# EAGLE board M_3x4._v2brd (EAGLE 9.6.2), part 1 of 2
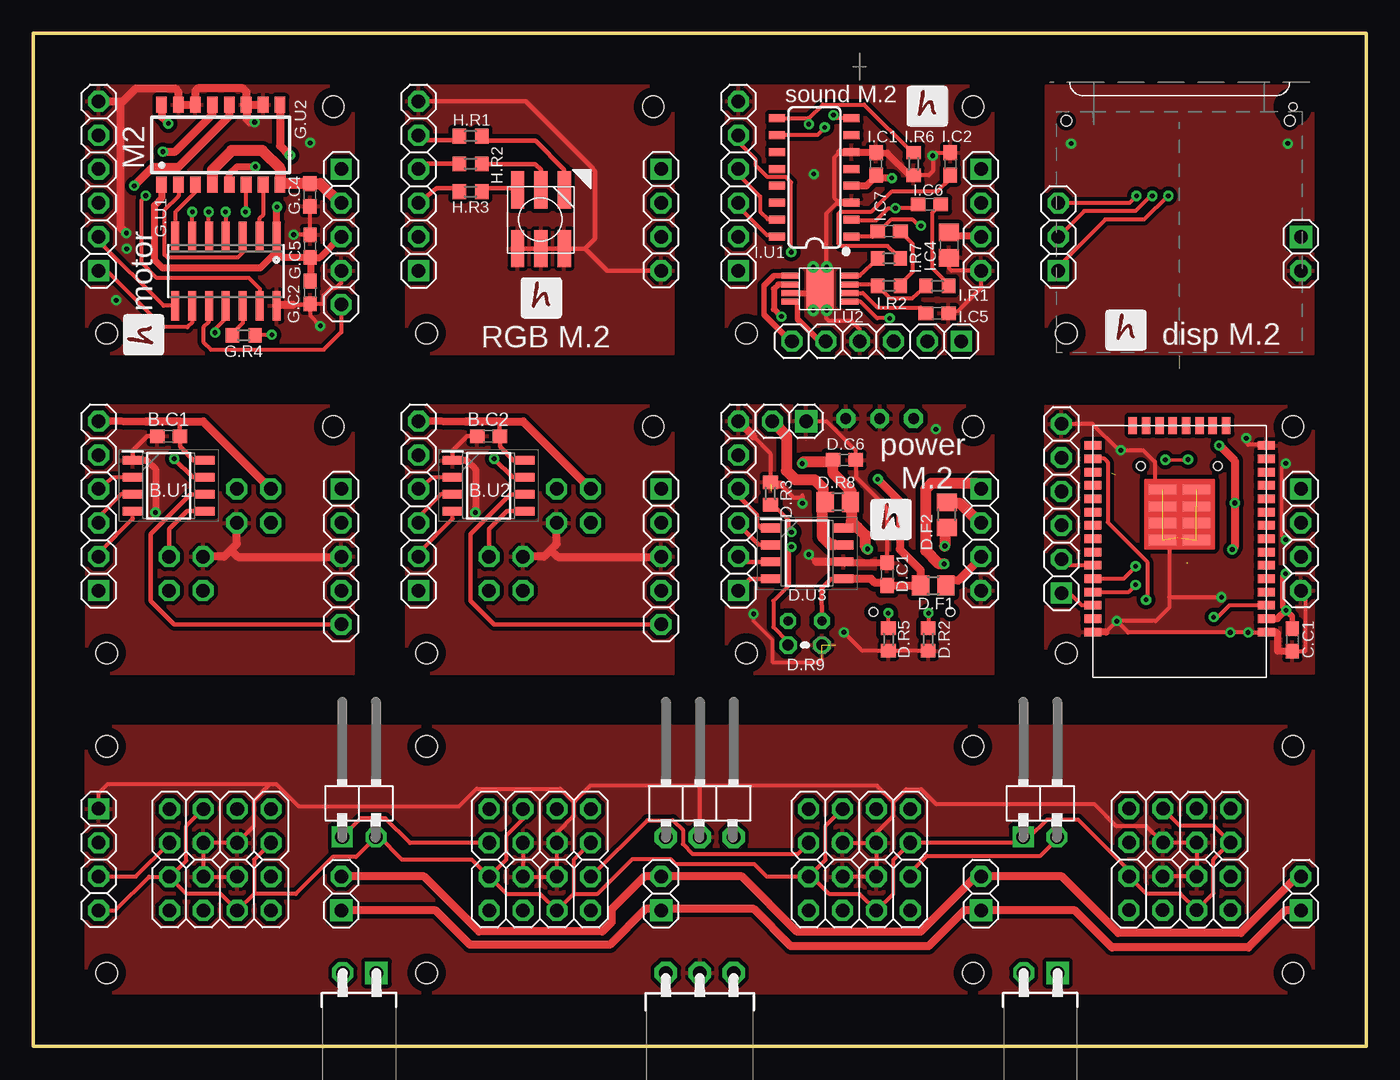
[diagram p0: board, top side]
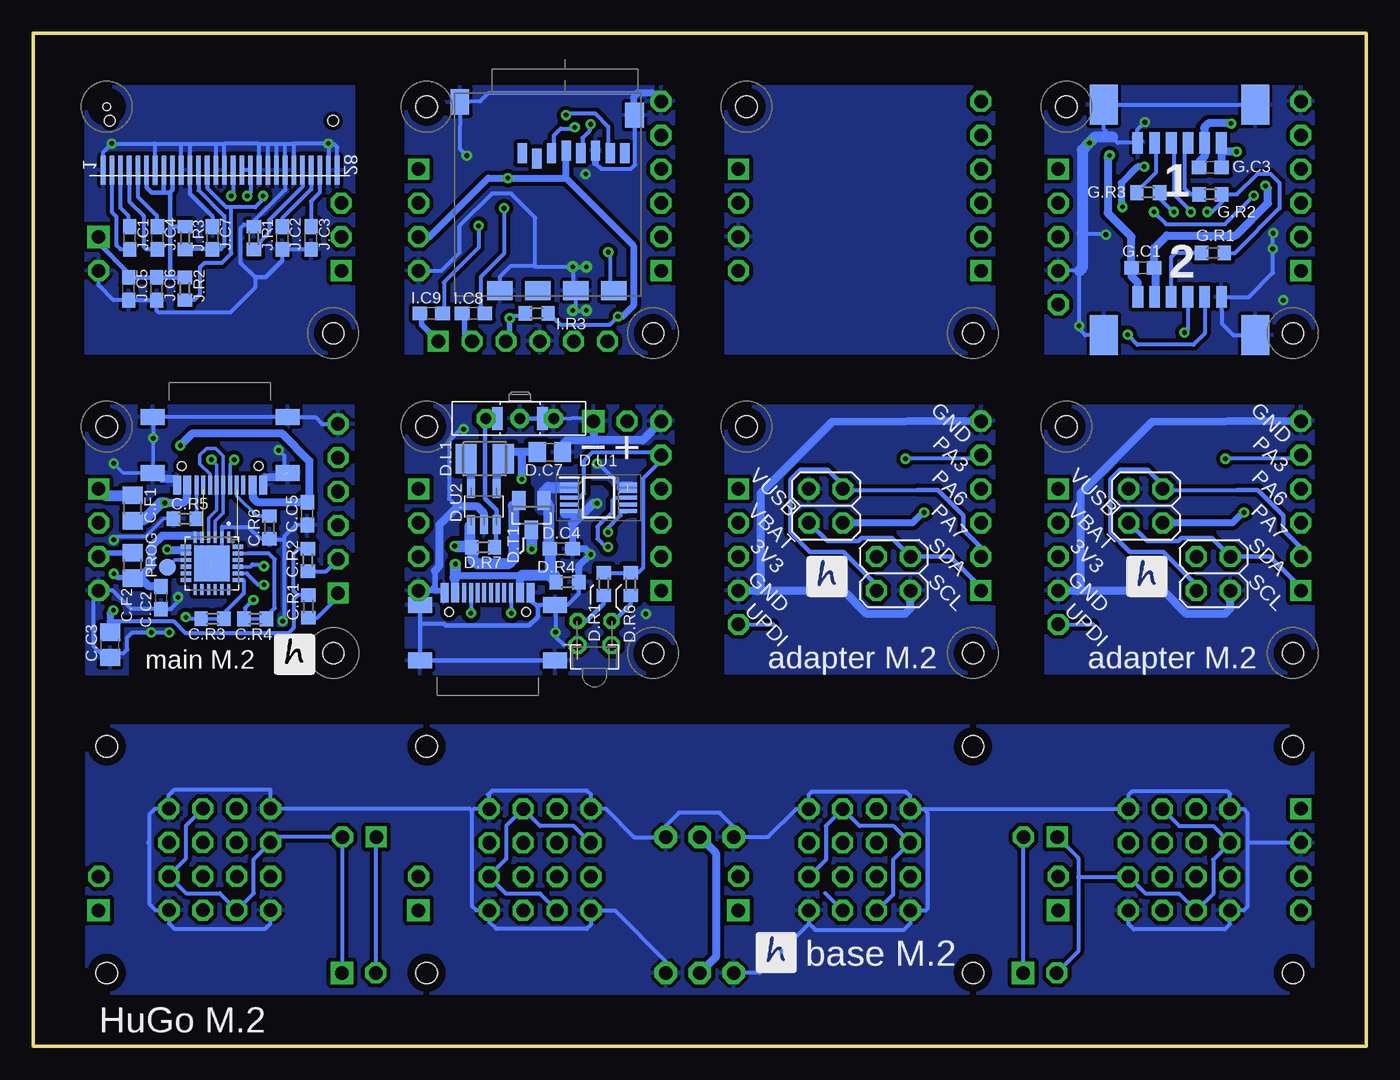
[diagram p1: board, bottom side, seen from below]

Size 100 x 76 mm. Coordinates in mm from the lower left corner, seen from the top.
Outline: 0,0 100,0 100,76 0,76 0,0
Copper layers (1*16): Top 0.035mm / dielectric 1.5mm / Bottom 0.035mm
Design rules "default *": minimum track width 10mil, minimum drill 0.35mm, track to track 6mil, track to pad 6mil, pad to pad 6mil, via to via 6mil, smd to smd 6mil, copper to edge 0mil, drill to drill 15mil, minimum pad ring 10mil, minimum via ring 8mil, stop-mask expansion 4mil, vias tented up to drill 0mil, thermal gap 10mil
Holes 1.6 mm at 94.5,5.5 94.5,22.5 5.5,22.5 5.5,5.5 70.5,22.5 70.5,5.5 29.5,22.5 29.5,5.5 29.5,29.5 46.5,46.5 29.5,53.5 46.5,70.5 53.5,53.5 70.5,70.5 5.5,29.5 22.5,46.5 5.5,53.5 22.5,70.5 53.5,29.5 70.5,46.5 77.5,53.5 77.5,29.5 94.5,46.5
Holes 0.6 mm at 94.5,70.5
tRestrict: area 4.5,21.5 to 6.5,23.5; area 4.5,4.5 to 6.5,6.5; area 93.5,21.5 to 95.5,23.5; area 93.5,4.5 to 95.5,6.5; area 69.5,21.5 to 71.5,23.5; area 69.5,4.5 to 71.5,6.5; area 28.5,4.5 to 30.5,6.5; area 28.5,21.5 to 30.5,23.5; area 45.5,69.5 to 47.5,71.5; area 28.5,52.5 to 30.5,54.5; area 69.5,69.5 to 71.5,71.5; area 52.5,52.5 to 54.5,54.5; 12 more areas
bRestrict: area 4.5,4.5 to 6.5,6.5; area 4.5,21.5 to 6.5,23.5; area 93.5,4.5 to 95.5,6.5; area 93.5,21.5 to 95.5,23.5; area 69.5,21.5 to 71.5,23.5; area 69.5,4.5 to 71.5,6.5; area 28.5,4.5 to 30.5,6.5; area 28.5,21.5 to 30.5,23.5; area 28.5,52.5 to 30.5,54.5; area 45.5,69.5 to 47.5,71.5; area 52.5,52.5 to 54.5,54.5; area 69.5,69.5 to 71.5,71.5; 12 more areas

## Footprints (pad centres in the part's own frame; a part is rotated, then mirrored left to right if it is on the bottom)
2X04 = drill 1.016 pad 1.575 octagon: 1 -3.81,-1.27; 2 -3.81,1.27; 3 -1.27,-1.27; 4 -1.27,1.27; 5 1.27,-1.27; 6 1.27,1.27; 7 3.81,-1.27; 8 3.81,1.27
1X02/90 = drill 1.016 pad 1.575 square: 1 -1.27,-3.81 | drill 1.016 pad 1.575 octagon: 2 1.27,-3.81
1X03/90 = drill 1.016 pad 1.676 octagon: 1 -2.54,-3.81; 2 0,-3.81; 3 2.54,-3.81
1X03/90F = drill 1.016 pad 1.676 octagon: 1 -2.54,0; 2 0,0; 3 2.54,0
1X02/90F = drill 1.016 pad 1.676 square: 1 -1.31,0 | drill 1.016 pad 1.575 octagon: 2 1.23,0
1X04 = drill 1.016 pad 1.575 square: 1 -3.81,0 | drill 1.016 pad 1.575 octagon: 2 -1.27,0; 3 1.27,0; 4 3.81,0
C0603 = smd 1.1 x 1: 1 -0.85,0; 2 0.85,0
1X06 = drill 1.016 pad 1.575 square: 1 -6.35,0 | drill 1.016 pad 1.575 octagon: 2 -3.81,0; 3 -1.27,0; 4 1.27,0; 5 3.81,0; 6 6.35,0
2X02 = drill 1.016 pad 1.575 octagon: 1 -1.27,-1.27; 2 -1.27,1.27; 3 1.27,-1.27; 4 1.27,1.27
1X05 = drill 1.016 pad 1.575 square: 1 -5.08,0 | drill 1.016 pad 1.575 octagon: 2 -2.54,0; 3 0,0; 4 2.54,0; 5 5.08,0
SOIC127P600X175-8N = smd 1.5 x 0.65: 1 -2.7,1.905; 2 -2.7,0.635; 3 -2.7,-0.635; 4 -2.7,-1.905; 5 2.7,-1.905; 6 2.7,-0.635; 7 2.7,0.635; 8 2.7,1.905
C0805 = smd 1.3 x 1.5: 1 -0.95,0; 2 0.95,0
R0805 = smd 1.3 x 1.5: 1 -0.95,0; 2 0.95,0
R0603 = smd 1 x 1.1: 1 -0.85,0; 2 0.85,0
TTGO-MICRO-32 = smd 1.27 x 0.635: 3V3 -6.5,5; EN -6.5,4; GND1 -6.5,6; GND2 -6.5,-8; GND3 6.5,6; IO0 6.5,-7; IO2 6.5,-8; IO4 6.5,-6; IO5 6.5,-3; IO12 -6.5,-7; IO14 -6.5,-6; IO16 6.5,-5; IO17 6.5,-4; IO18 6.5,-2; IO19 6.5,-1; IO21 6.5,1; IO22 6.5,4; IO23 6.5,5; IO25 -6.5,-3; IO26 -6.5,-4; IO27 -6.5,-5; IO32 -6.5,-1; IO33 -6.5,-2; IO34 -6.5,1; IO35 -6.5,0; NC 6.5,0; RXD0 6.5,2; TXD0 6.5,3; VN -6.5,2; VP -6.5,3 | smd 0.635 x 1.27: CLK 0.5,-9.5; CMD -0.5,-9.5; IO13 -3.5,-9.5; IO15 3.5,-9.5; SD0 1.5,-9.5; SD1 2.5,-9.5; SD2 -2.5,-9.5; SD3 -1.5,-9.5 | smd 2.032 x 0.762: GND4 -1.27,-0.889; GND5 1.27,-0.889; GND6 -1.27,-2.159; GND7 1.27,-2.159; GND8 -1.27,-3.429; GND9 -1.27,-4.699; GND10 1.27,-3.429; GND11 1.27,-4.699
LED_1.8 = drill 0.7 octagon: 1 -1.27,-0.4; 2 1.27,-0.4
L3230M = smd 1.6 x 2.2: 1 -1.4,0; 2 1.4,0
1X02 = drill 1.016 pad 1.676 square: 1 -1.27,0 | drill 1.016 pad 1.575 octagon: 2 1.27,0
SWITCH = drill 0.8 pad 1.422 octagon: P$1 -2.54,0; P$2 0,0; P$3 2.54,0 | smd 0.8 x 1.7: P$4 -1.7,0; P$5 1.7,0
THERM = drill 0.813 octagon: 1 -1.27,0; 2 1.27,0
SOT23 = smd 1 x 1.4: D 0,1.1; G -0.95,-1.1; S 0.95,-1.1
SOP50P490X110-10N = smd 1.4 x 0.3: 1 -2.2,1; 2 -2.2,0.5; 3 -2.2,0; 4 -2.2,-0.5; 5 -2.2,-1; 6 2.2,-1; 7 2.2,-0.5; 8 2.2,0; 9 2.2,0.5; 10 2.2,1
SOT32-5 = smd 0.6 x 1.4: BP 0.95,1.35; GND 0,-1.35; SHDN 0.95,-1.35; VIN -0.95,-1.35; VOUT -0.95,1.35
SOIC127P600X175-8N' = smd 1.528 x 0.65: 1 -2.711,1.905; 2 -2.711,0.635; 3 -2.711,-0.635; 4 -2.711,-1.905; 5 2.711,-1.905; 6 2.711,-0.635; 7 2.711,0.635; 8 2.711,1.905
A1250WR-6 = smd 0.8 x 1.6: 1 -3.128,2.54; 2 -1.878,2.54; 3 -0.628,2.54; 4 0.622,2.54; 5 1.872,2.54; 6 3.142,2.54 | smd 2.1 x 3: $1 -5.678,-0.34; $2 5.682,-0.34
SO14 = smd 0.6 x 2.2: 1 -3.81,-2.6; 2 -2.54,-2.6; 3 -1.27,-2.6; 4 0,-2.6; 5 1.27,-2.6; 6 2.54,-2.6; 7 3.81,-2.6; 8 3.81,2.6; 9 2.54,2.6; 10 1.27,2.6; 11 0,2.6; 12 -1.27,2.6; 13 -2.54,2.6; 14 -3.81,2.6
SOP16 = smd 0.8 x 1.2: 1 -4.445,-3; 2 -3.175,-3; 3 -1.905,-3; 4 -0.635,-3; 5 0.635,-3; 6 1.905,-3; 7 3.175,-3; 8 4.445,-3; 9 4.445,3; 10 3.175,3; 11 1.905,3; 12 0.635,3; 13 -0.635,3; 14 -1.905,3; 15 -3.175,3; 16 -4.445,3
RGB_WW-FCE50TC-Q1 = smd 1 x 2.8: 1 -1.778,-2.286; 2 -0.028,-2.286; 3 1.722,-2.286; 4 -1.778,2.114; 5 -0.028,2.114; 6 1.722,2.114
SSD_1306_STM32_OLED = smd 0.35 x 2.2 bottom: P$1 0,-0.4; P$2 0.65,-0.4; P$3 1.3,-0.4; P$4 1.95,-0.4; P$5 2.6,-0.4; P$6 3.25,-0.4; P$7 3.9,-0.4; P$8 4.55,-0.4; P$9 5.2,-0.4; P$10 5.85,-0.4; P$11 6.5,-0.4; P$12 7.15,-0.4; P$13 7.8,-0.4; P$14 8.45,-0.4; P$15 9.1,-0.4; P$16 9.75,-0.4; P$17 10.4,-0.4; P$18 11.05,-0.4; P$19 11.7,-0.4; P$20 12.35,-0.4; P$21 13,-0.4; P$22 13.65,-0.4; P$23 14.3,-0.4; P$24 14.95,-0.4; P$25 15.6,-0.4; P$26 16.25,-0.4; P$27 16.9,-0.4; P$28 17.55,-0.4 | hole 0.8: 0.5,-4.1; 17.25,-4.1
SO16 = smd 0.6 x 1.2: 1 -4.445,-2.8; 2 -3.175,-2.8; 3 -1.905,-2.8; 4 -0.635,-2.8; 5 0.635,-2.8; 6 1.905,-2.8; 7 3.175,-2.8; 8 4.445,-2.8; 9 4.445,2.8; 10 3.175,2.8; 11 1.905,2.8; 12 0.635,2.8; 13 -0.635,2.8; 14 -1.905,2.8; 15 -3.175,2.8; 16 -4.445,2.8
MSOP-POWERPAD-8 = smd 1.4 x 0.45: 1 -2.184,0.959; 2 -2.184,0.309; 3 -2.184,-0.341; 4 -2.184,-0.991; 5 2.216,-0.991; 6 2.216,-0.341; 7 2.216,0.309; 8 2.216,0.959 | smd 2 x 3: 9 0.016,-0.016 | drill 0.35: P$10 -0.484,-1.651; P$11 0.516,-1.651; P$12 0.516,1.619; P$13 -0.484,1.619
1X03 = drill 1.016 pad 1.575 square: 1 -2.54,0 | drill 1.016 pad 1.575 octagon: 2 0,0; 3 2.54,0
B1,27 = smd 1.27 x 1.27: TP 0,0
QFN50P400X400X80-25N = smd 0.81 x 0.26: 1 -1.955,1.25; 2 -1.955,0.75; 3 -1.955,0.25; 4 -1.955,-0.25; 5 -1.955,-0.75; 6 -1.955,-1.25; 13 1.955,-1.25; 14 1.955,-0.75; 15 1.955,-0.25; 16 1.955,0.25; 17 1.955,0.75; 18 1.955,1.25 | smd 0.26 x 0.81: 7 -1.25,-1.955; 8 -0.75,-1.955; 9 -0.25,-1.955; 10 0.25,-1.955; 11 0.75,-1.955; 12 1.25,-1.955; 19 1.25,1.955; 20 0.75,1.955; 21 0.25,1.955; 22 -0.25,1.955; 23 -0.75,1.955; 24 -1.25,1.955 | smd 2.68 x 2.68: 25 0,0
USB-C = smd 0.6 x 1.45: A1B12 -3.235,3.825; A4B9 -2.46,3.825; B1A12 3.215,3.825; B4A9 2.44,3.825 | smd 0.3 x 1.45: A5 -1.26,3.825; A6 -0.26,3.825; A7 0.24,3.825; A8 1.24,3.825; B5 1.74,3.825; B6 0.74,3.825; B7 -0.76,3.825; B8 -1.76,3.825 | smd 1.8 x 1.2: SH1 -5.08,2.91; SH2 -5.08,-1.27; SH3 5.06,-1.27; SH4 5.06,2.91 | hole 0.65: 2.88,2.38; -2.9,2.38
MOCRO_SD = smd 0.7 x 1.5: 1 8.92,-10.7; 2 7.82,-10.3; 3 6.72,-10.7; 4 5.62,-10.9; 5 4.52,-10.7; 6 3.42,-10.9; 7 2.32,-10.7; 8 1.22,-10.7 | smd 1.9 x 1.4: G1 4.9,-0.4; G2 10.6,-0.4; S1 2.05,-0.4; S2 7.75,-0.4 | smd 1.4 x 1.9: G3 0.5,-13.55; G4 13.6,-14.55

## Placement (x,y rotation side)
A.J1  [2X04]  14.02,16.53 180 top
A.J2  [2X04]  14.02,11.45 180 top
A.J3  [2X04]  38.01,16.53 180 top
A.J4  [2X04]  38.01,11.45 180 top
A.J5  [2X04]  61.98,16.53 180 top
A.J6  [2X04]  61.98,11.45 180 top
A.J7  [1X02/90]  24.44,19.5 0 top
A.J8  [1X03/90]  50,19.5 0 top
A.J9  [1X03/90F]  50,5.5 180 top
A.J10  [1X02/90F]  24.44,5.5 180 top
A.J11  [2X04]  86.01,11.47 0 top
A.J12  [2X04]  86.02,16.55 0 top
A.J13  [1X02/90F]  75.54,5.5 180 top
A.J14  [1X02/90]  75.54,19.5 0 top
A.J15  [1X04]  4.9,14 270 top
B.C1  100n  [C0603]  10.15,45.76 0 top
B.C2  100n  [C0603]  34.15,45.76 0 top
B.J1  [1X06]  28.9,40.54 90 top
B.J2  [1X06]  4.9,40.54 90 top
B.J3  [2X02]  40.54,40.54 270 bottom
B.J4  [2X02]  16.54,40.54 270 bottom
B.J5  [1X05]  23.1,36.73 270 top
B.J6  [1X05]  47.1,36.73 270 top
B.U1  AT412  [SOIC127P600X175-8N]  10.16,42.05 0 top
B.U2  AT412  [SOIC127P600X175-8N]  34.16,42.05 0 top
C.C1  100n  [C0603]  94.46,30.48 270 top
C.C2  100n  [C0603]  90.42,33.65 270 bottom
C.C3  22u  [C0805]  94.25,30.12 270 bottom
C.C5  1u  [C0603]  79.45,39.96 90 bottom
C.F1  [R0805]  92.56,40.38 90 bottom
C.F2  [R0805]  92.56,36.07 90 bottom
C.J2  [1X06]  77.14,40.35 90 top
C.R1  2k2  [R0603]  79.37,32.99 90 bottom
C.R2  2k2  [R0603]  79.4,36.48 90 bottom
C.R3  0  [R0603]  86.56,32.07 0 bottom
C.R4  0  [R0603]  83.36,32.06 180 bottom
C.R5  5K1  [R0603]  88.63,39.58 0 bottom
C.R6  5k1  [R0603]  82.28,38.93 90 bottom
C.U1  TTGO-MICRO-32  [TTGO-MICRO-32]  85.99,37.08 180 top
D.C1  100n  [C0603]  64.05,35.42 270 top
D.C4  4u7  [C0603]  60.4,37.32 180 bottom
D.C6  4u7  [C0603]  60.85,43.99 180 top
D.C7  22u  [C0805]  61.24,44.58 180 bottom
D.D1  LED_1.8  [LED_1.8]  57.9,31.51 180 bottom
D.F1  [R0805]  67.52,34.58 0 top
D.F2  [R0805]  68.53,39.87 90 top
D.J2  [1X06]  52.9,40.54 90 top
D.J3  [1X04]  71.1,38 270 top
D.L1  2u2  [L3230M]  66.13,44.09 0 bottom
D.LIPOL  [1X02]  56.71,46.89 180 top
D.ON/OFF/RESET  SWITCH  [SWITCH]  63.5,47.1 0 bottom
D.R1  100k  [R0603]  57.21,34.67 90 bottom
D.R2  5k1  [R0603]  67.15,30.52 270 top
D.R3  1k  [R0603]  55.3,41.47 270 top
D.R4  100k  [R0603]  59.93,34.82 180 bottom
D.R5  5k1  [R0603]  64.16,30.52 270 top
D.R6  330  [R0603]  55.18,34.66 270 bottom
D.R7  100k  [R0603]  66.25,37.43 0 bottom
D.R8  0.1  [R0805]  60.35,40.84 180 top
D.R9  TERM_10K  [THERM]  57.9,30.1 180 top
D.T1  FDV  [SOT23]  62.63,39.84 180 bottom
D.U1  MCP73833-AMI_UN  [SOP50P490X110-10N]  57.6,41.16 0 bottom
D.U2  LM3671_3.3  [SOT32-5]  66.19,40.5 0 bottom
D.U3  INA219AIDR  [SOIC127P600X175-8N']  58.05,36.97 0 top
G.C1  100n  [C0603]  16.76,58.41 180 bottom
G.C2  100n  [C0603]  20.77,56.55 90 top
G.C3  100n  [C0603]  11.7,65.93 0 bottom
G.C4  4u7  [C0603]  20.75,63.87 90 top
G.C5  4u7  [C0603]  20.77,60.04 270 top
G.J1  [1X06]  4.9,64.54 90 top
G.J2  [1X05]  23.1,60.73 270 top
G.J3  A1250WR-6  [A1250WR-6]  14,53.68 0 bottom
G.MOTO1  A1250WR-6  [A1250WR-6]  14,70.32 180 bottom
G.R1  100  [R0603]  11.49,59.52 0 bottom
G.R2  100  [R0603]  11.7,63.92 0 bottom
G.R3  10k  [R0603]  16.36,64.05 0 bottom
G.R4  10k  [R0603]  15.79,53.34 180 top
G.U1  AT414  [SO14]  14.45,58.15 180 top
G.U2  MX1508  [SOP16]  14.07,67.63 0 top
H.D1  RGB_WW-FCE50TC-Q1  [RGB_WW-FCE50TC-Q1]  38.05,61.95 180 top
H.J2  [1X06]  28.9,64.54 90 top
H.J4  [1X06]  63.27,52.9 180 top
H.R1  82  [R0603]  32.8,68.28 0 top
H.R2  82  [R0603]  32.8,66.2 0 top
H.R3  82  [R0603]  32.8,64.11 0 top
I.C1  100n  [C0603]  63.23,66.2 90 top
I.C2  10n  [C0603]  68.8,66.2 270 top
I.C4  10u (22u)  [C0805]  68.71,60.1 90 top
I.C5  220n  [C0603]  67.81,55 180 top
I.C6  10n  [C0603]  67.24,63.15 0 top
I.C7  10n  [C0603]  64.2,61.15 0 top
I.C8  100n  [C0603]  66.98,55 180 bottom
I.C9  100n  [C0603]  70.14,55 180 bottom
I.J1  SSD_1306_STM32_OLED  [SSD_1306_STM32_OLED]  94.75,65.33 180 top
I.J2  [1X06]  52.9,64.54 90 top
I.J3  [1X04]  71.1,62 270 top
I.J4  [1X02]  95.1,59.46 270 top
I.R1  10k  [R0603]  67.82,57.05 180 top
I.R2  10k  [R0603]  64.2,57.05 180 top
I.R3  10k  [R0603]  62.23,55 0 bottom
I.R6  1k5  [R0603]  66.05,66.2 90 top
I.R7  10k  [R0603]  64.2,59.1 180 top
I.U1  WT2003S  [SO16]  58.6,65.19 90 top
I.U2  TPA6211  [MSOP-POWERPAD-8]  59.03,56.82 180 top
J.C1  1u  [C0603]  92.77,60.64 270 bottom
J.C2  2u2  [C0603]  81.32,60.64 90 bottom
J.C3  2u  [C0603]  79.16,60.64 90 bottom
J.C4  1u  [C0603]  90.69,60.64 270 bottom
J.C5  2u2  [C0603]  92.85,56.83 90 bottom
J.C6  100n  [C0603]  90.74,56.83 90 bottom
J.C7  2u2  [C0603]  86.55,60.64 270 bottom
J.J1  [1X03]  76.9,60.73 90 top
J.R1  390  [R0603]  83.45,60.64 270 bottom
J.R2  100k  [R0603]  88.63,56.83 90 bottom
J.R3  2k2  [R0603]  88.61,60.64 270 bottom
JB1  [2X02]  35.46,35.46 270 bottom
JB3  [2X02]  11.46,35.46 270 bottom
JP1  [1X02]  23.1,11.46 90 top
JP2  [1X02]  47.1,11.46 90 top
JP3  [1X02]  71.1,11.46 90 top
JP4  [1X02]  95.1,11.46 90 top
JP5  [1X04]  47.1,62 270 top
JP6  [1X04]  95.1,38 270 top
PROG  TPB1,27  [B1,27]  89.95,35.93 0 bottom
U1  CP2104-F03-GM  [QFN50P400X400X80-25N]  86.6,36.22 270 bottom
U$1  USB-C  [USB-C]  65.91,30.2 0 bottom
U$2  MICRO_SD  [MOCRO_SD]  54.4,56.3 180 bottom
U$3  USB-C  [USB-C]  86,45.93 180 bottom

## Library data of the parts
A.J1-A.J15 B.J1-B.J6 C.J2 D.J2 D.J3 D.LIPOL G.J1 G.J2 H.J2 H.J4 I.J2-I.J4 J.J1 JB1 JB3 JP1-JP6 = pinhead2
B.C1 B.C2 C.C1-C.C3 C.C5 D.C1 D.C4 D.C6 D.C7 G.C1-G.C5 I.C1 I.C2 I.C4-I.C9 J.C1-J.C7 = rcl; SPICEPREFIX: C
B.U1 B.U2 = ATTINY412-SSN; DESCRIPTION: 8-bit Microcontrollers - MCU 20MHz, 4KB, SOIC8, Ind 105C, Green, Tube; HEIGHT: 1.75mm; MANUFACTURER_NAME: Microchip; MANUFACTURER_PART_NUMBER: ATTINY412-SSN; MOUSER_PART_NUMBER: 579-ATTINY412-SSN; MOUSER_PRICE-STOCK: https://www.mouser.co.uk/ProductDetail/Microchip-Technology/ATTINY412-SSN?qs=3HJ2avRr9PItQG9ZsCamPQ%3D%3D
C.F1 C.F2 C.R1-C.R6 D.F1 D.F2 D.R1-D.R8 G.R1-G.R4 I.R1-I.R3 I.R6 I.R7 J.R1-J.R3 = rcl; SPICEPREFIX: R
C.U1 D.D1 D.ON/OFF/RESET D.R9 G.J3 G.MOTO1 G.U2 H.D1 I.J1 I.U2 U$1-U$3 = hugo
D.L1 = rcl; SPICEPREFIX: L
D.T1 D.U2 = !stavebnice03
D.U1 = SamacSys_Parts; DESCRIPTION: Microchip MCP73833-AMI/UN, Battery Charge Controller Lithium-Ion, Lithium-Polymer, 10-Pin MSOP; HEIGHT: 1.1mm; MANUFACTURER_NAME: Microchip; MANUFACTURER_PART_NUMBER: MCP73833-AMI/UN; MOUSER_PART_NUMBER: 579-MCP73833-AMI/UN; MOUSER_PRICE-STOCK: https://www.mouser.co.uk/ProductDetail/Microchip-Technology/MCP73833-AMI-UN?qs=Fxu3fLyJv8fd%2FGnsUSC9lg%3D%3D
D.U3 = SamacSys_Parts; DESCRIPTION: 26-V, Bidirectional, Zero-Drift, High-Side, I2C Out Current/Power Monitor; HEIGHT: 1.75mm; MANUFACTURER_NAME: Texas Instruments; MANUFACTURER_PART_NUMBER: INA219AIDR; MOUSER_PART_NUMBER: 595-INA219AIDR; MOUSER_PRICE-STOCK: https://www.mouser.co.uk/ProductDetail/Texas-Instruments/INA219AIDR?qs=XGzIaZb%2FFYIE5YcOHTnKDA%3D%3D
G.U1 = atmel
H.R1-H.R3 = resistor
I.U1 = WT2003S
PROG = testpad
U1 = CP2104; AVAILABILITY: Unavailable; DESCRIPTION: USB Bridge, USB to UART USB 2.0 UART Interface 24-QFN (4x4); MF: Silicon Labs; MP: CP2104; PACKAGE: QFN-24 Silicon Labs; PRICE: None

## Nets
3V1: B.C2.1 B.J3.4 B.J6.3 B.U2.1 JB1.1
3V3: B.C1.1 B.J4.4 B.J5.3 B.U1.1 JB3.1
3V3F: D.F1.2 D.J3.3
_FOTOA1_: G.R3.2 G.U1.4
_FOTOA2_: G.R4.2 G.U1.12
FOTOA1: G.MOTO1.5 G.R3.1
FOTOA2: G.J3.5 G.R4.1
FOTOB1: G.MOTO1.4 G.U1.5
FOTOB2: G.J3.4 G.U1.11
GND: A.J1.1 A.J1.7 A.J2.2 A.J2.8 A.J3.1 A.J3.7 A.J4.2 A.J4.8 A.J5.1 A.J5.7 A.J6.2 A.J6.8 A.J8.1 A.J8.3 A.J9.1 A.J9.3 A.J11.1 A.J11.7 A.J12.2 A.J12.8 A.J15.2
GND1: B.C1.2 B.J2.6 B.J4.1 B.J5.4 B.U1.8 JB3.4
GND2: B.C2.2 B.J1.6 B.J3.1 B.J6.4 B.U2.8 JB1.4
GND3: D.C1.1 D.C4.1 D.C6.1 D.C7.1 D.J2.6 D.J3.4 D.LIPOL.1 D.ON/OFF/RESET.P$2 D.ON/OFF/RESET.P$3 D.ON/OFF/RESET.P$5 D.R2.2 D.R3.1 D.R4.1 D.R5.2 D.R9.1 D.U1.5 D.U2.GND D.U3.6 U$1.A1B12 U$1.B1A12 U$1.SH1 U$1.SH2 U$1.SH3 U$1.SH4
GND4: C.C1.2 C.C2.2 C.C3.2 C.C5.1 C.J2.6 C.R5.1 C.R6.1 C.U1.GND1 C.U1.GND2 C.U1.GND3 C.U1.GND4 C.U1.GND5 C.U1.GND6 C.U1.GND7 C.U1.GND8 C.U1.GND9 C.U1.GND10 C.U1.GND11 JP6.4 U1.2 U1.25 U$3.A1B12 U$3.B1A12 U$3.SH1 U$3.SH2 U$3.SH3 U$3.SH4
GND5: G.C2.1 G.C4.1 G.C5.1 G.J1.6 G.J2.4 G.J3.6 G.J3.$1 G.J3.$2 G.MOTO1.6 G.MOTO1.$1 G.MOTO1.$2 G.U1.14 G.U2.10 G.U2.11 G.U2.14 G.U2.15
GND6: H.D1.4 H.D1.5 H.D1.6 H.J2.6 JP5.4
GND7: H.J4.4 I.C1.2 I.C2.1 I.C4.1 I.C5.1 I.J2.6 I.J3.4 I.R6.1 I.U1.3 I.U1.6 I.U2.7 I.U2.9 I.U2.P$10 I.U2.P$11 I.U2.P$12 I.U2.P$13 U$2.6 U$2.G1 U$2.G2 U$2.G3 U$2.G4
GND8: I.J1.P$1 I.J1.P$7 I.J1.P$10 I.J1.P$11 I.J1.P$14 I.J1.P$15 I.J1.P$19 I.J1.P$20 I.J1.P$21 I.J1.P$22 I.J1.P$23 I.J1.P$27 I.J1.P$28 I.J4.2 J.C2.1 J.C3.1 J.C5.1 J.C6.1 J.C7.1 J.R1.1
IN+: D.LIPOL.2 D.R8.2 D.U3.7
IN-: D.C6.2 D.R8.1 D.T1.D D.U1.9 D.U1.10 D.U3.8
INA1: G.U1.3 G.U2.2
INA2: G.U1.13 G.U2.6
INB1: G.U1.7 G.U2.3
INB2: G.U1.2 G.U2.7
M_V: G.C4.2 G.J2.2 G.U2.4 G.U2.8
MA1: G.C3.1 G.MOTO1.2 G.U2.16
MA2: G.C1.1 G.J3.2 G.U2.12
MB1: G.C3.2 G.MOTO1.1 G.U2.13
MB2: G.C1.2 G.J3.1 G.U2.9
N$1: H.D1.2 H.R2.2
N$2: D.L1.1 D.U2.VOUT
N$3: D.D1.1 D.R6.2
N$4: D.R5.1 U$1.B5
N$5: D.ON/OFF/RESET.P$1 D.ON/OFF/RESET.P$4 D.R7.2 D.U2.SHDN
N$6: D.R2.1 U$1.A5
N$7: D.R3.2 D.U1.6
N$8: H.D1.1 H.R1.2
N$9: U1.4 U$3.A7 U$3.B7
N$10: D.R9.2 D.U1.8
N$11: U1.3 U$3.A6 U$3.B6
N$12: C.R6.2 U$3.A5
N$13: C.R5.2 U$3.B5
N$14: C.F2.2 JP6.3
N$15: C.F1.2 JP6.1
N$16: PROG.TP U1.9
N$17: H.D1.3 H.R3.2
N$18: H.J2.5 H.R1.1
N$19: H.J2.4 H.R2.1
N$20: H.J2.3 H.R3.1
N$21: I.C6.1 I.C8.1 I.U1.2
N$22: I.C7.1 I.C9.1 I.U1.1
N$23: I.C5.2 I.U2.2
N$24: I.R1.2 I.R2.2 I.U2.3
N$25: I.C6.2 I.R1.1
N$26: I.C7.2 I.R2.1
N$27: I.C2.2 I.R7.1
N$28: I.R7.2 I.U2.4
N$29: I.U1.13
N$30: I.J2.5 U$2.S1
N$31: I.J1.P$24 J.R1.2
N$32: I.J1.P$25 J.C2.2
N$33: I.J1.P$2 J.C1.2
N$34: I.J1.P$3 J.C1.1
N$35: I.J1.P$4 J.C4.2
N$36: I.J1.P$5 J.C4.1
N$37: I.J1.P$26 J.C3.2
N$38: I.J1.P$12 J.C7.2 J.R3.2
PA1: I.J1.P$13 J.J1.3 J.R2.1
PA2: B.J1.5 B.U2.7
PA3: B.J2.5 B.U1.7
PA4: B.J1.4 B.U2.2
PA5: B.J1.3 B.U2.3
PA6: B.J2.4 B.U1.2
PA7: B.J2.3 B.U1.3
PA8: D.J2.5 D.R1.2 D.R6.1 D.U1.3
PA9: D.J2.4 D.U3.1
PA10: D.J2.3 D.U3.2
POWER1: G.MOTO1.3 G.R2.1
POWER2: G.J3.3 G.R1.1
POWER_LED: G.R1.2 G.R2.2 G.U1.6
PROG: C.R4.1 C.R4.2 C.U1.IO0 U1.23
RESET: C.R3.1 C.R3.2 C.U1.EN U1.19
RX: I.J2.4 I.U1.15
RX1: C.U1.TXD0 U1.20
SCL: A.J1.2 A.J1.5 A.J2.4 A.J2.7 A.J3.2 A.J3.5 A.J4.4 A.J4.7 A.J5.2 A.J5.5 A.J6.4 A.J6.7 A.J7.2 A.J10.1 A.J11.2 A.J11.5 A.J12.4 A.J12.7 A.J13.2 A.J14.1 A.J15.4
SCL1: B.J2.1 B.J4.3 B.U1.5 JB3.2
SCL2: B.J1.1 B.J3.3 B.U2.5 JB1.2
SCL3: D.J2.1 D.U3.4
SCL4: G.J1.1 G.U1.9
SCL5: I.J1.P$16 J.J1.1
SCL6: C.J2.1 C.R1.1 C.U1.IO22
SDA: A.J1.3 A.J1.8 A.J2.1 A.J2.6 A.J3.3 A.J3.8 A.J4.1 A.J4.6 A.J5.3 A.J5.8 A.J6.1 A.J6.6 A.J7.1 A.J10.2 A.J11.3 A.J11.8 A.J12.1 A.J12.6 A.J13.1 A.J14.2 A.J15.3
SDA1: B.J2.2 B.J4.2 B.U1.4 JB3.3
SDA2: B.J1.2 B.J3.2 B.U2.4 JB1.3
SDA3: D.J2.2 D.U3.3
SDA4: G.J1.2 G.U1.8
SDA5: I.J1.P$17 I.J1.P$18 J.J1.2
SDA6: C.J2.2 C.R2.1 C.U1.IO21
SDCLK: I.R6.2 I.U1.9 U$2.5
SDCMD: I.U1.10 U$2.3
SDDAT: I.U1.8 U$2.7
SHTDOWN: H.J4.3 I.R3.1 I.U2.1
TX: I.J2.3 I.U1.16
TX1: C.U1.RXD0 U1.21
UPDI: B.J5.5 B.U1.6
UPDI1: G.J2.5 G.U1.10
UPDI2: B.J6.5 B.U2.6
VBAT: JP1.2 JP2.2 JP3.2 JP4.2
VBATF: D.F2.2 D.J3.2
VCC: A.J1.4 A.J1.6 A.J2.3 A.J2.5 A.J3.4 A.J3.6 A.J4.3 A.J4.5 A.J5.4 A.J5.6 A.J6.3 A.J6.5 A.J8.2 A.J9.2 A.J11.4 A.J11.6 A.J12.3 A.J12.5 A.J15.1
VCC1: D.C1.2 D.C7.2 D.D1.2 D.F1.1 D.L1.2 D.R1.1 D.U2.BP D.U3.5
VCC2: G.C2.2 G.C5.2 G.J2.3 G.U1.1 G.U2.1 G.U2.5
VCC3: I.C1.1 I.C4.2 I.J3.3 I.R3.2 I.U1.4 I.U2.6 U$2.4
VCC4: C.C1.1 C.C2.1 C.C3.1 C.F2.1 C.R1.2 C.R2.2 C.U1.3V3 U1.5 U1.6
VDD: JP5.3
VDD1: I.J1.P$6 I.J1.P$8 I.J1.P$9 I.J4.1 J.C5.2 J.C6.2 J.R2.2 J.R3.1
VMOT: D.F2.1 D.R7.1 D.T1.S D.U2.VIN
VO+: H.J4.6 I.U2.5
VO-: H.J4.5 I.U2.8
VOUTL: H.J4.1 I.C9.2
VOUTR: H.J4.2 I.C8.2
VUSB: JP1.1 JP2.1 JP3.1 JP4.1
VUSB1: D.C4.2 D.J3.1 D.R4.2 D.T1.G D.U1.1 D.U1.2 U$1.A4B9 U$1.B4A9
VUSB2: C.C5.2 C.F1.1 U1.7 U1.8 U$3.A4B9 U$3.B4A9